# Altium PCB ReactionWheelPCB(1).PcbDoc
Units mm, origin at the board's own origin, x right, y up, seen from the top; angles counter-clockwise.
Board outline 90.17 x 95.88 mm, 4 copper layers (F.Cu, In1.Cu, In2.Cu, B.Cu); 37 components, 178 nets, 356 pads, 53 vias.
Unrouted connection lines stored in the file: 3.
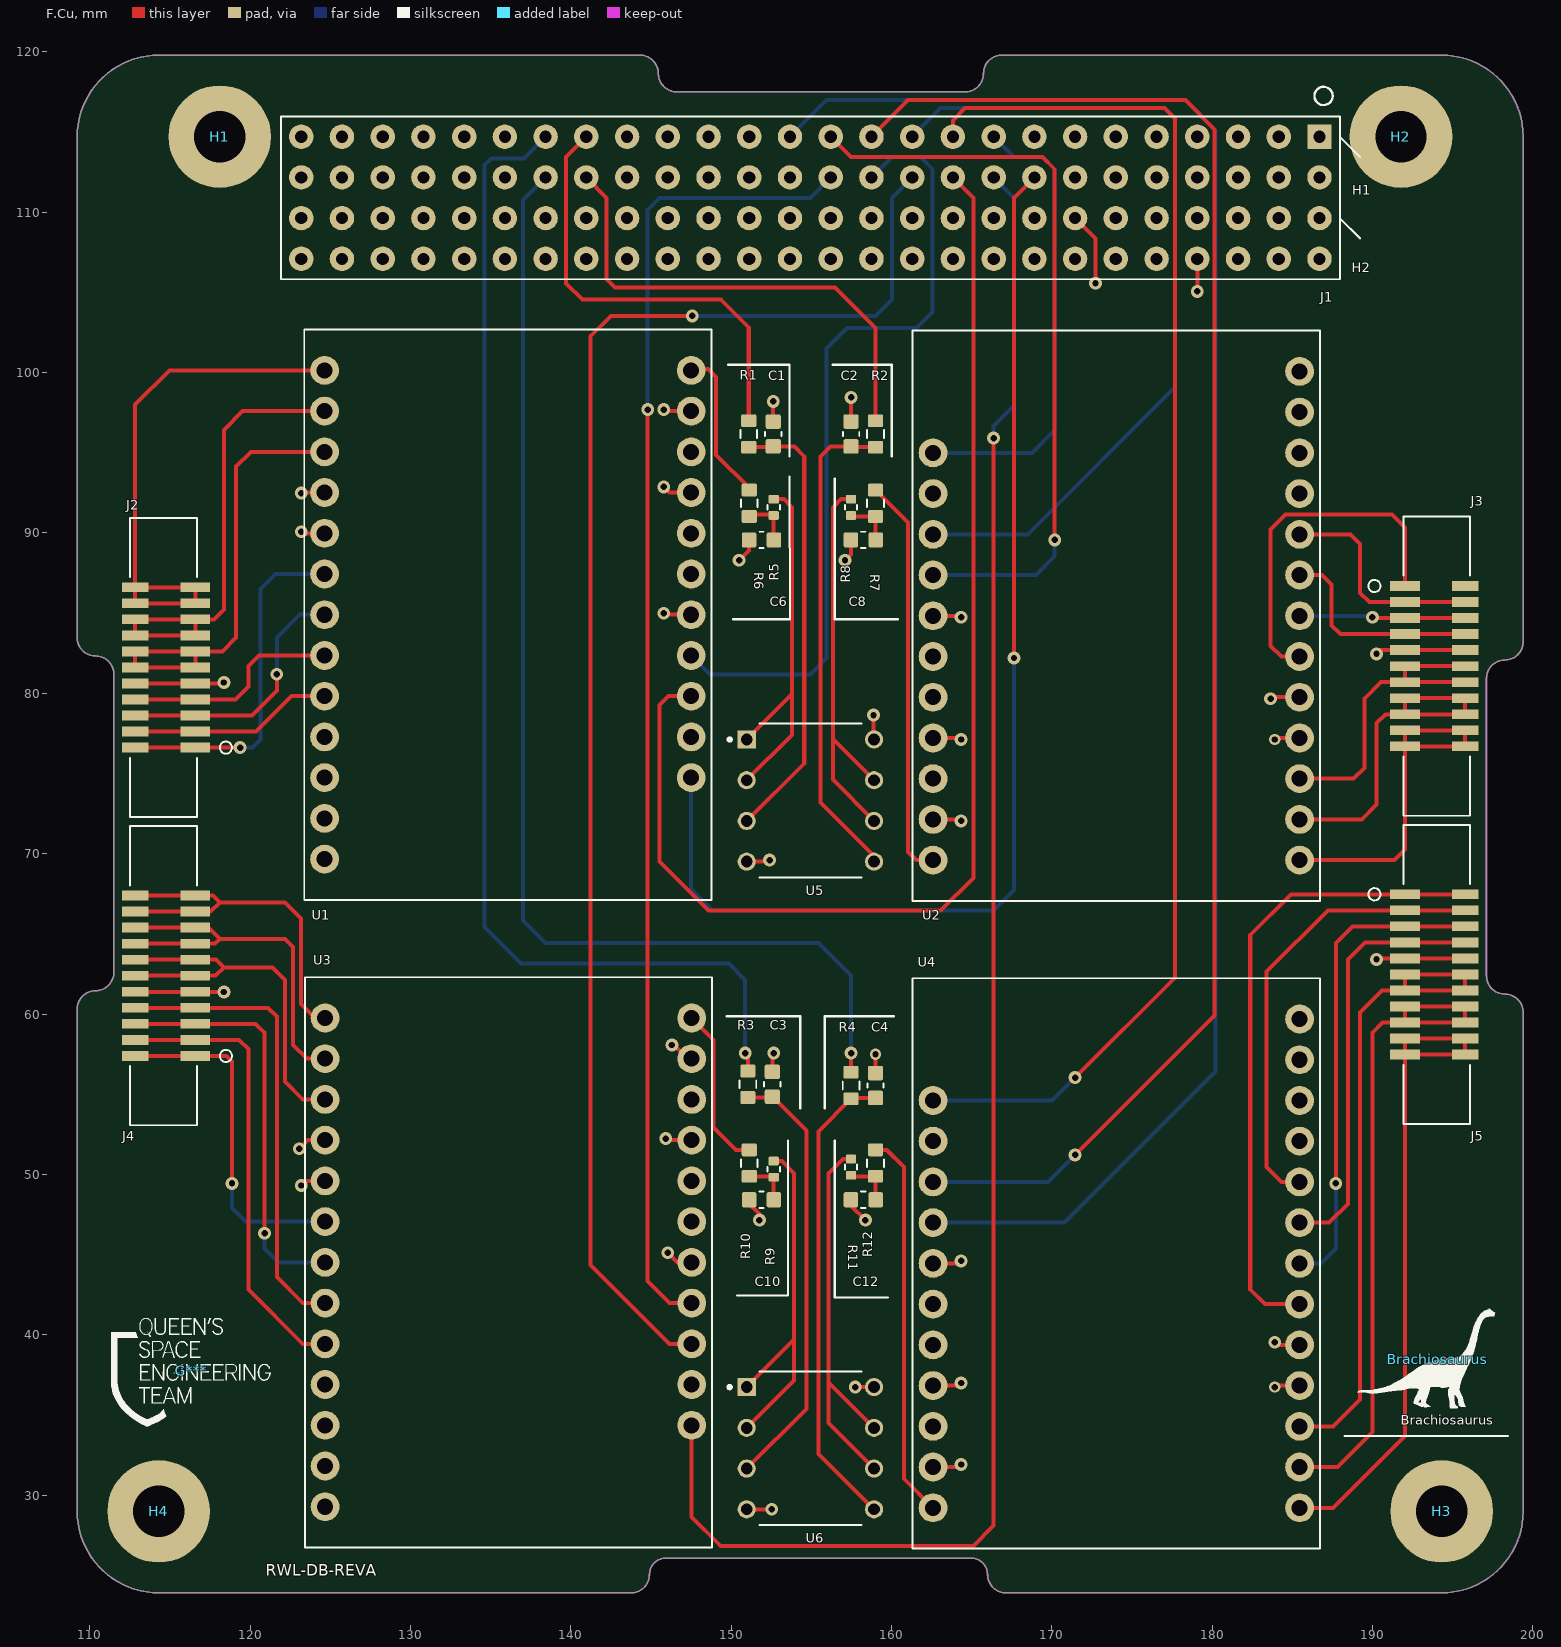
[diagram p0: F.Cu view]
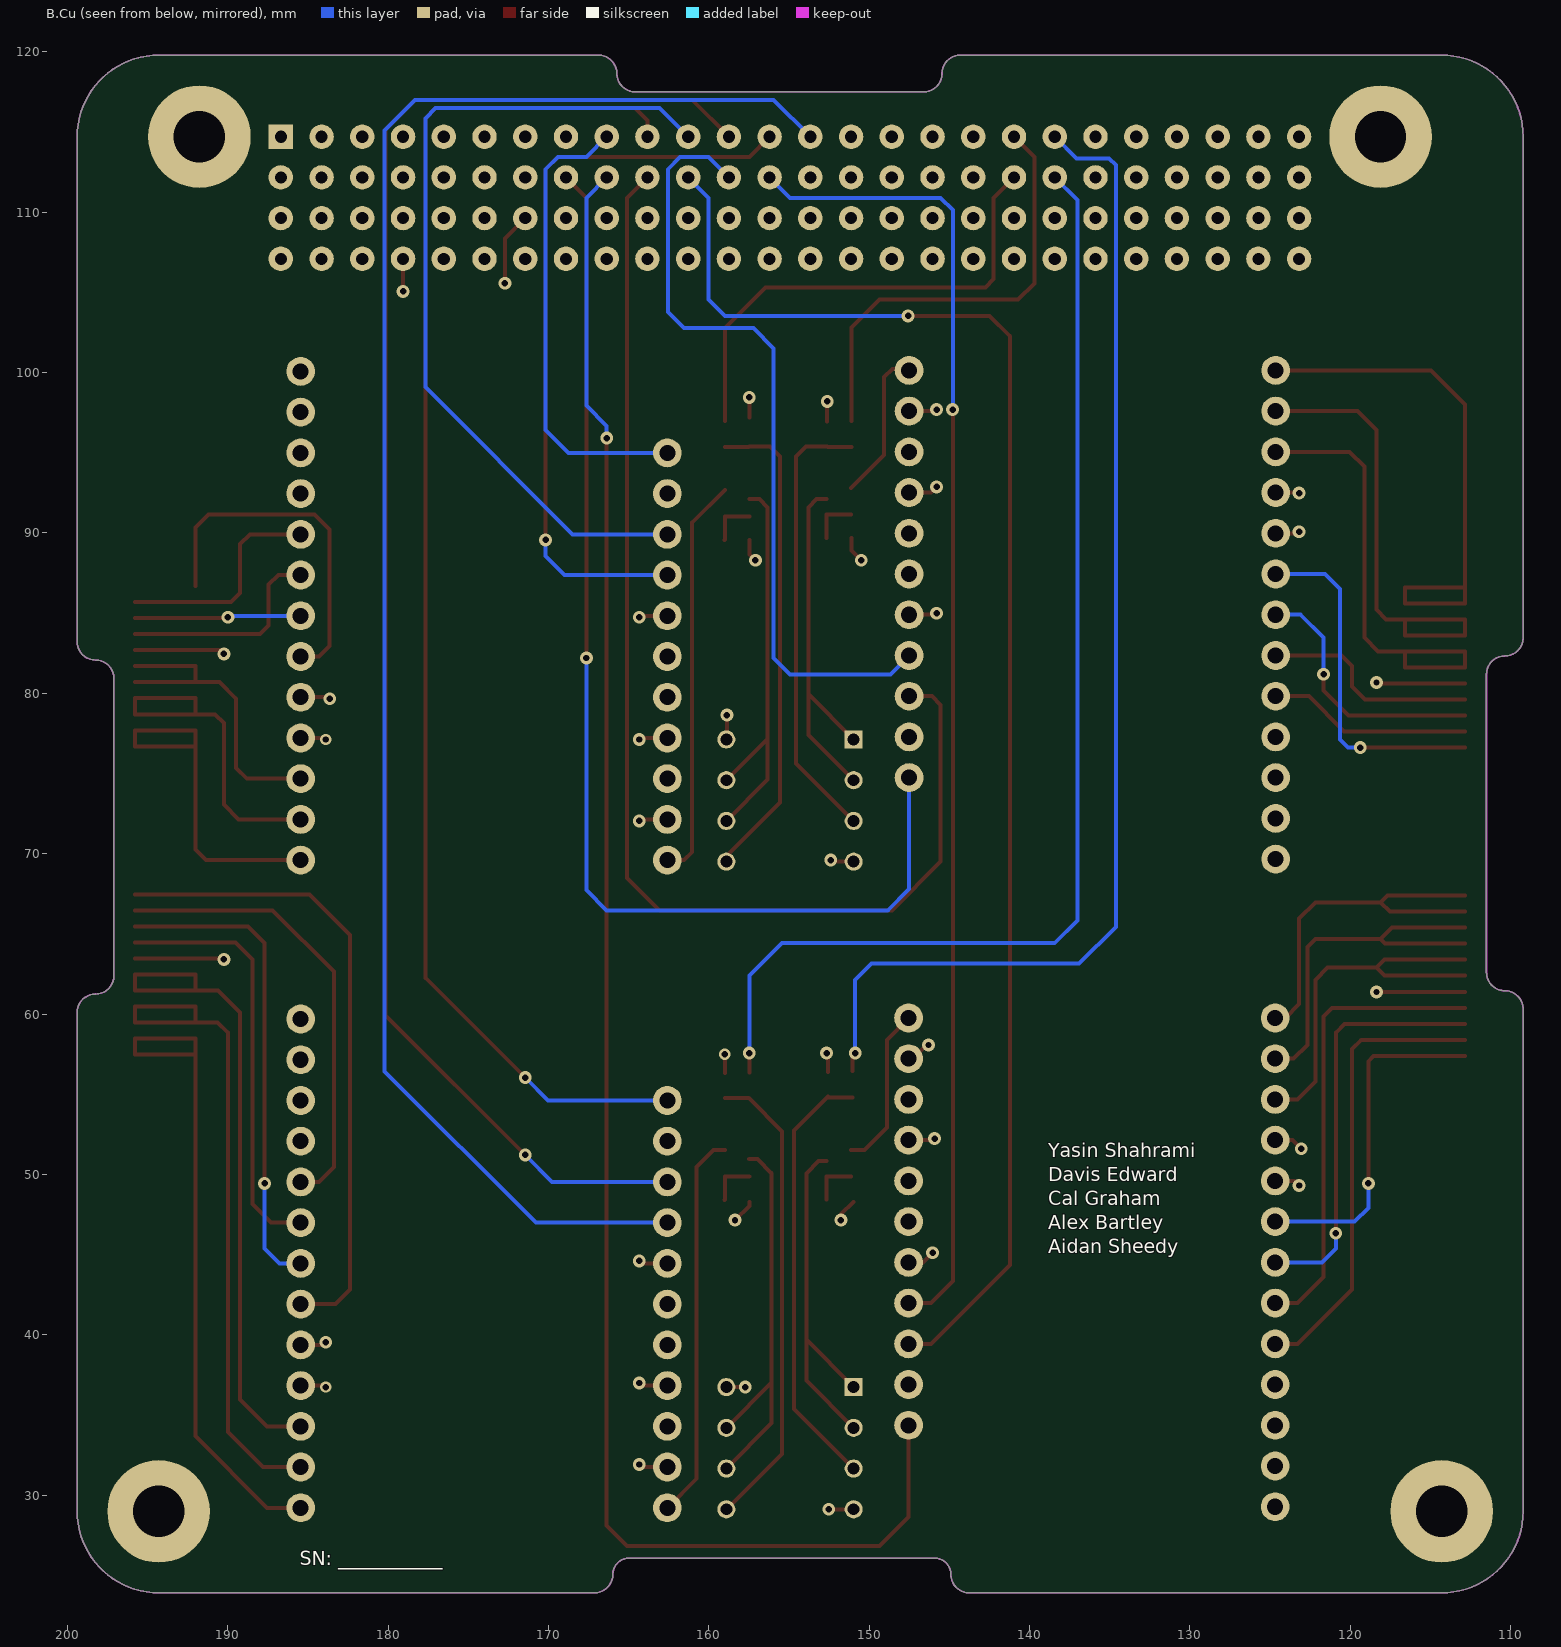
[diagram p1: B.Cu view, seen from below]
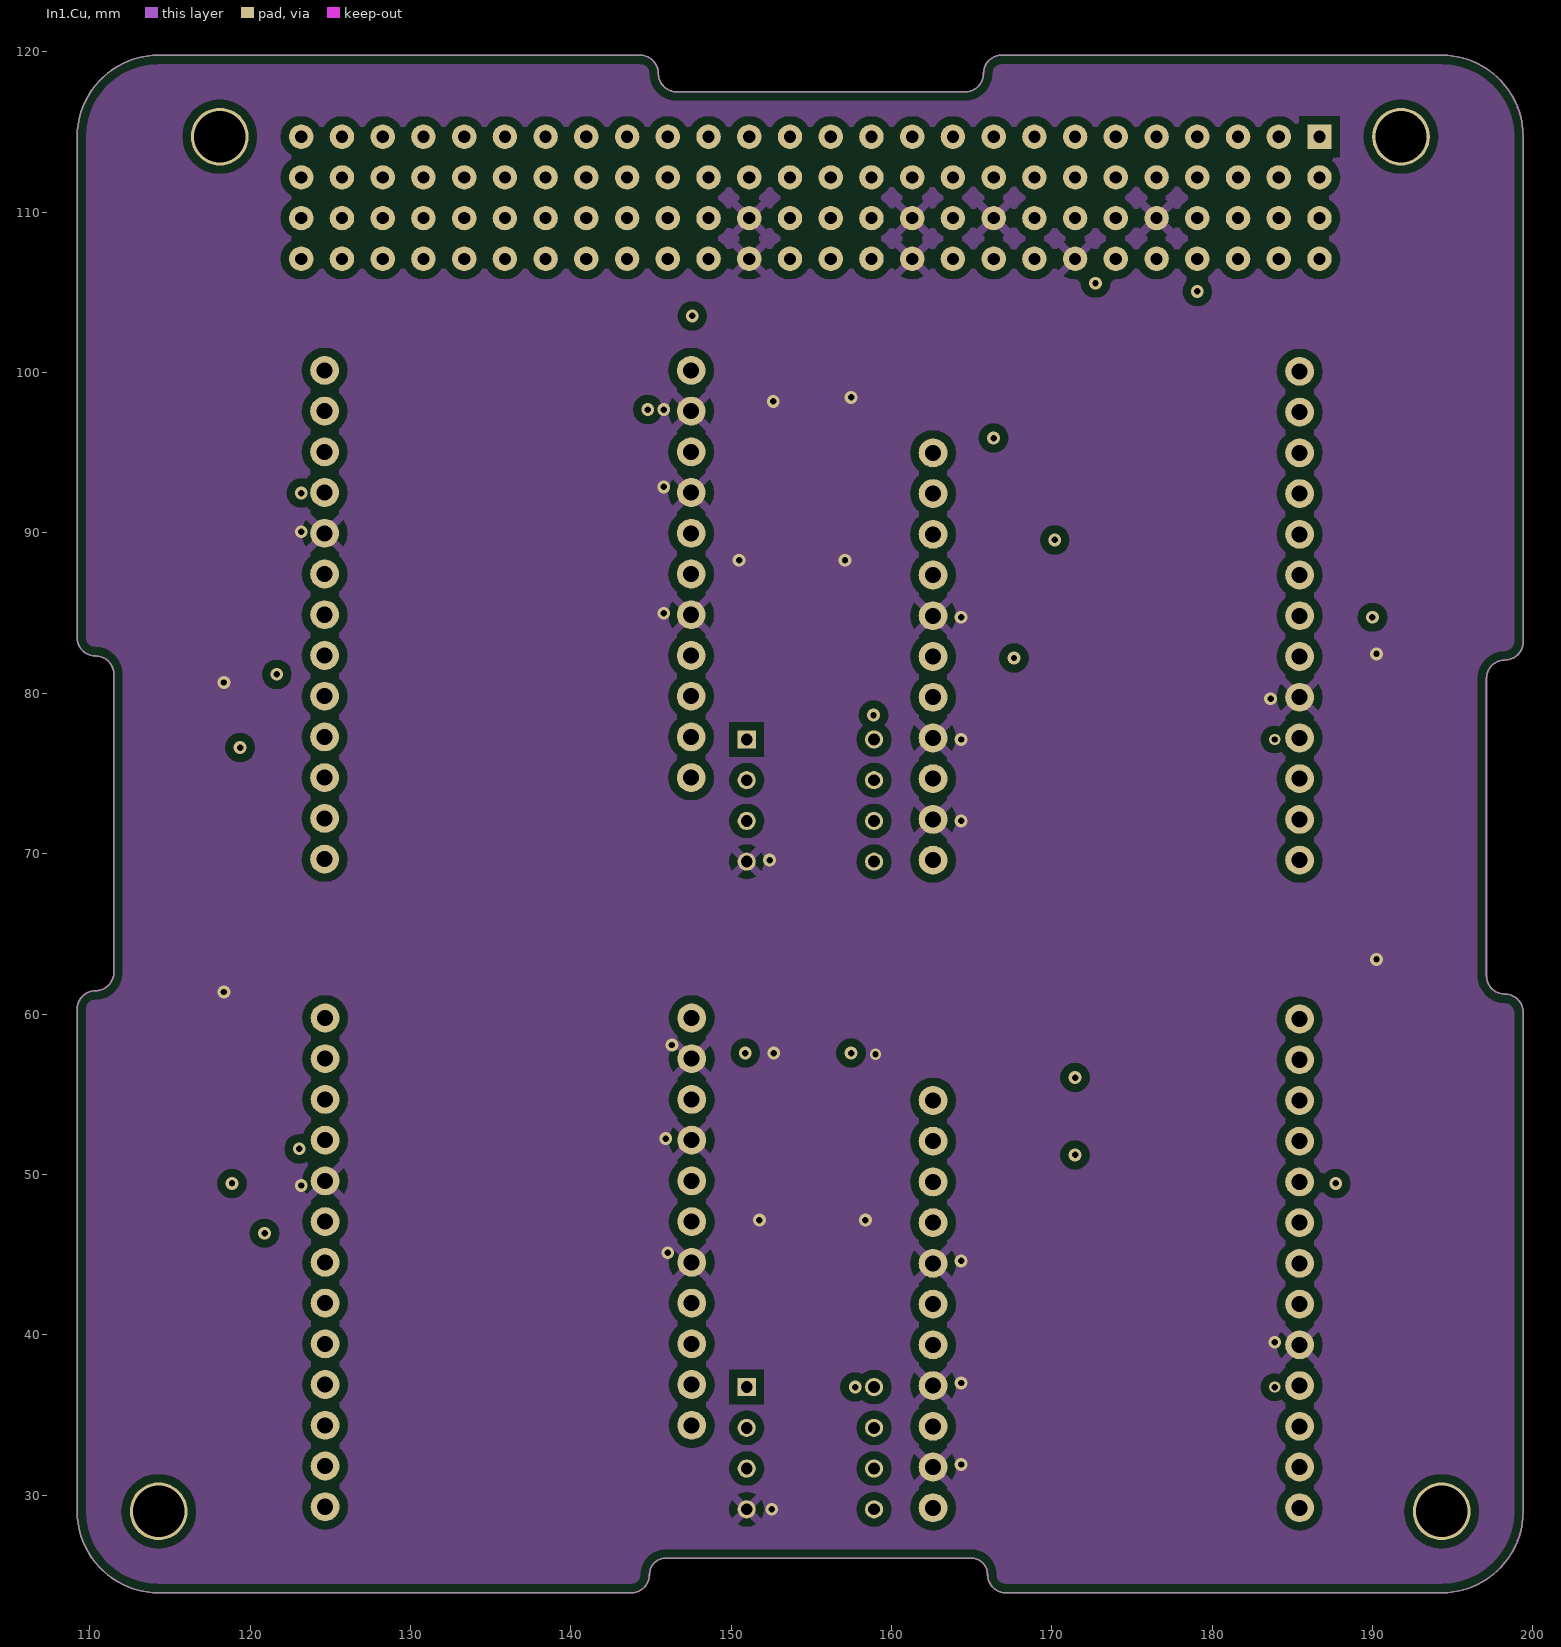
[diagram p2: In1.Cu]
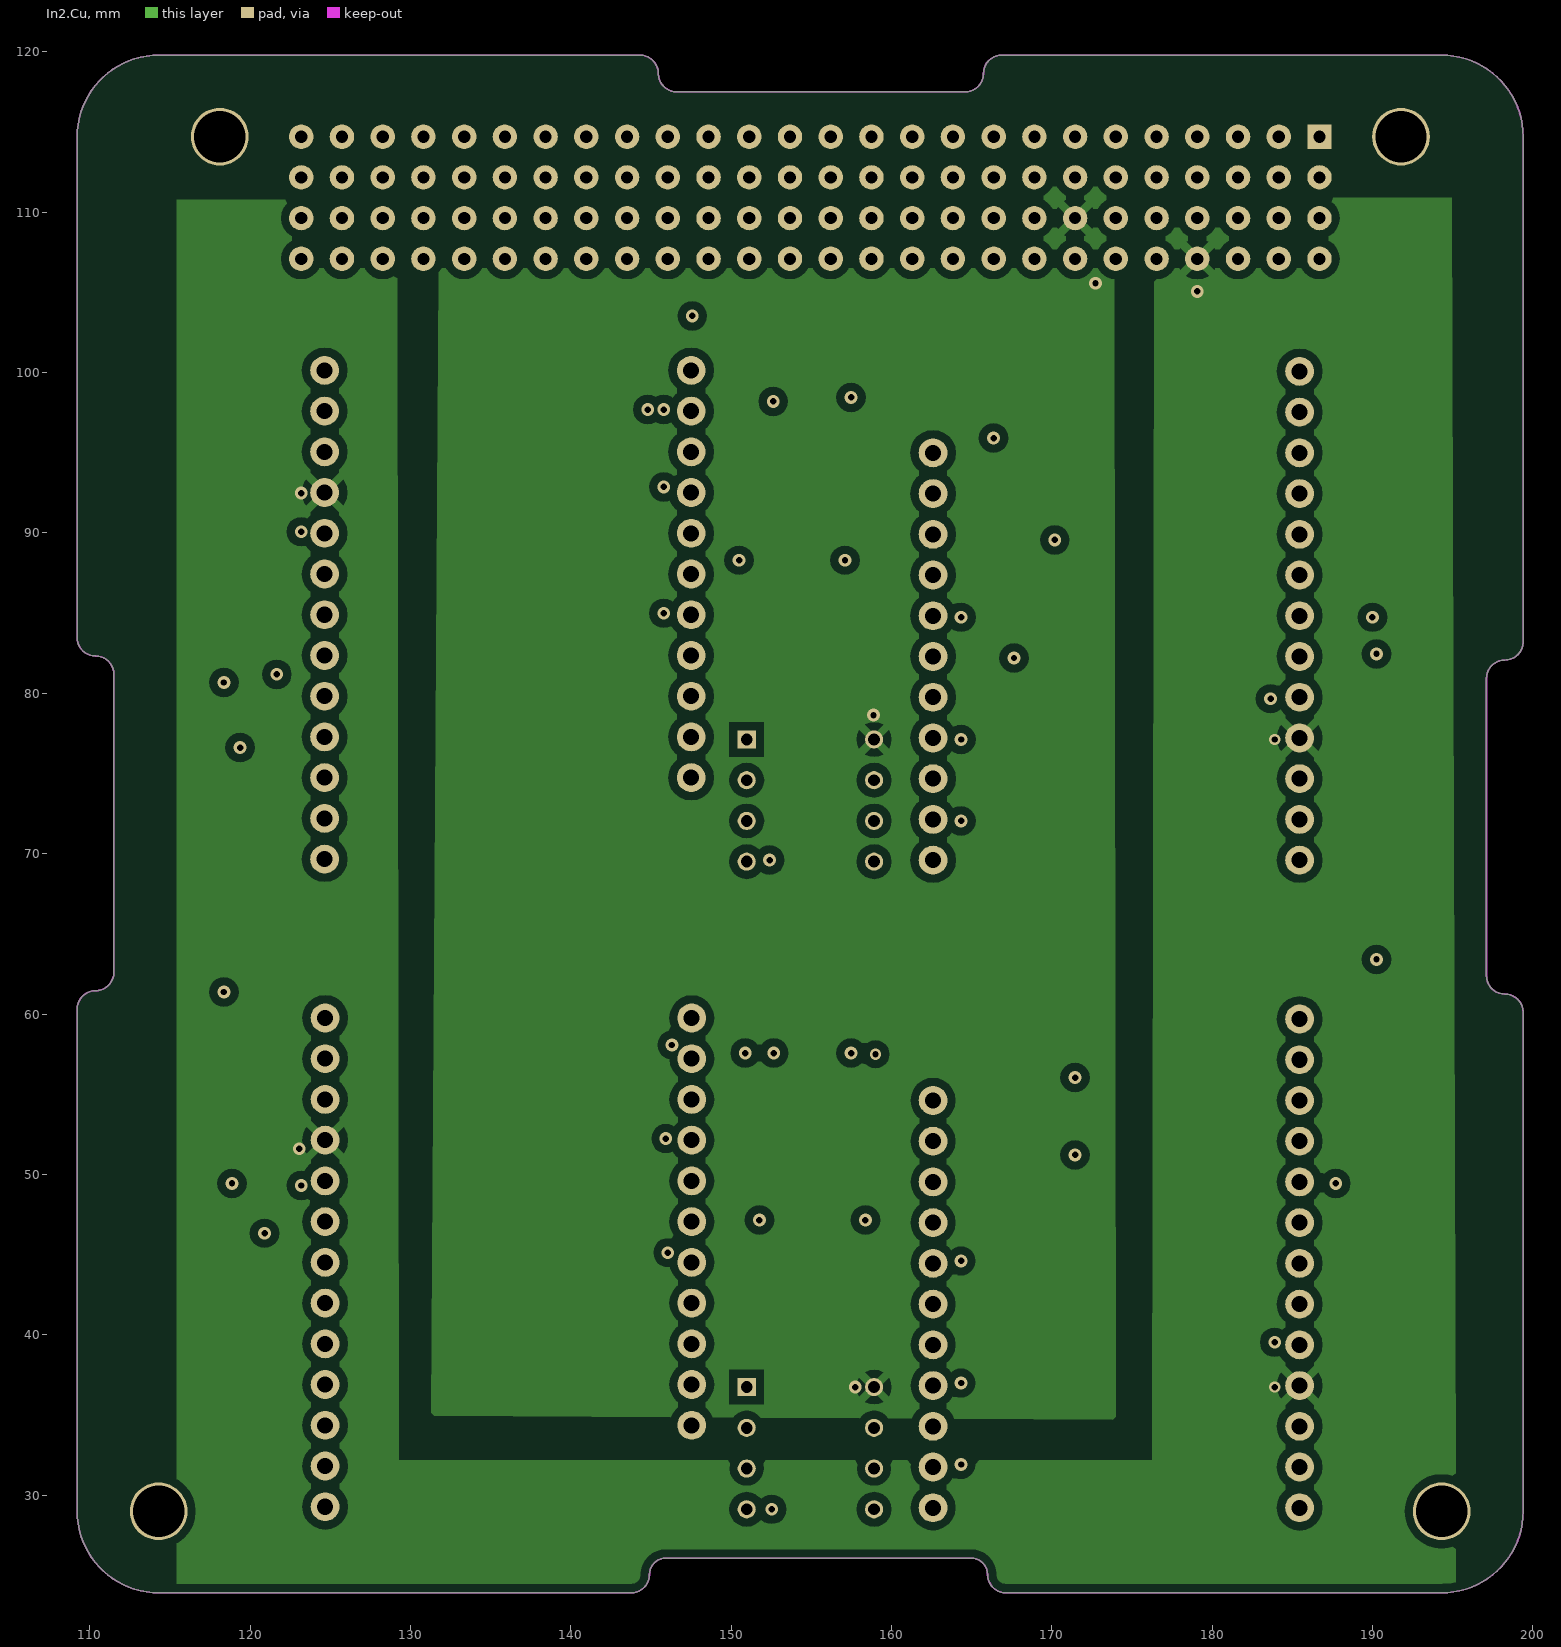
[diagram p3: In2.Cu]

## Layer stack, top to bottom
F.Mask: solder mask 0.0102, Solder Resist, Dk 3.5
F.Cu: signal copper 0.0356
Dielectric 1: dielectric 0.32, FR-4, Dk 4.8
In1.Cu: signal copper 0.0356
Dielectric2: dielectric 0.32, FR-4, Dk 4.8
In2.Cu: signal copper 0.0356
Dielectric3: dielectric 0.32, FR-4, Dk 4.8
B.Cu: signal copper 0.0356
B.Mask: solder mask 0.0102, Solder Resist, Dk 3.5

## Board outline
109.22,83.471 109.22,114.713 cw(c114.3,114.713) 114.3,119.793 144.318,119.793 cw(c144.318,118.65) 145.461,118.65 ccw(c146.604,118.65) 146.604,117.507 164.592,117.507 ccw(c164.592,118.65) 165.735,118.65 cw(c166.878,118.65) 194.31,119.793 cw(c194.31,114.713) 199.39,114.713 199.39,83.217 cw(c198.247,83.217) 198.247,82.074 ccw(c198.247,80.931) 197.104,80.931 197.104,62.389 ccw(c198.247,62.389) 198.247,61.246 cw(c198.247,60.103) 199.39,60.103 199.39,28.988 cw(c194.31,28.988) 194.31,23.908 167.132,23.908 cw(c167.132,25.051) 165.989,25.051 ccw(c164.973,25.051) 164.973,26.067 145.923,26.067 ccw(c145.923,25.051) 144.907,25.051 cw(c143.764,25.051) 143.764,23.908 114.3,23.908 cw(c114.3,28.988) 109.22,28.988 109.22,60.311 cw(c110.363,60.311) 110.363,61.454 ccw(c110.363,62.597) 111.506,62.597 111.506,81.185 ccw(c110.363,81.185) 110.363,82.328 cw(c110.363,83.471) 109.22,83.471

## Design rules (kind name [scope] priority, off if disabled: settings)
Clearance "Clearence 0.508_Polygon" [InNamedPolygon('In1.Cu-GND') OR InNamedPolygon('In2.Cu-+5V') OR InNamedPolygon('In2.Cu-+12V')] p1: gap=0.508 ignorepadtopadclearanceinfootprint=FALSE
MinimumSolderMaskSliver [All] p1: minsoldermaskwidth=0
PolygonConnect Polygon_In2.Cu-+12V_ConnectDirect [IsNamedPolygon('In2.Cu-+12V') vs IsVia] p1: connectstyle=Direct reliefconductorwidth=0.254 reliefentries=4 polygonreliefangle="90 Angle" airgapwidth=0.254
PolygonConnect Polygon_In2.Cu-+12V_ConnectRelief45 [IsNamedPolygon('In2.Cu-+12V') vs (IsThruPin or IsSMTPin) and (PadShape_AllLayers = 'Round')] p2: connectstyle=Relief reliefconductorwidth=0.508 reliefentries=4 polygonreliefangle="45 Angle" airgapwidth=0.508
PolygonConnect Polygon_In2.Cu-+12V_ConnectRelief90 [IsNamedPolygon('In2.Cu-+12V') vs (IsThruPin or IsSMTPin) and (PadShape_AllLayers <> 'Round')] p3: connectstyle=Relief reliefconductorwidth=0.508 reliefentries=4 polygonreliefangle="90 Angle" airgapwidth=0.508
PolygonConnect Polygon_In2.Cu-+5V_ConnectDirect [IsNamedPolygon('In2.Cu-+5V') vs IsVia] p4: connectstyle=Direct reliefconductorwidth=0.254 reliefentries=4 polygonreliefangle="90 Angle" airgapwidth=0.254
PolygonConnect Polygon_In2.Cu-+5V_ConnectRelief45 [IsNamedPolygon('In2.Cu-+5V') vs (IsThruPin or IsSMTPin) and (PadShape_AllLayers = 'Round')] p5: connectstyle=Relief reliefconductorwidth=0.508 reliefentries=4 polygonreliefangle="45 Angle" airgapwidth=0.508
PolygonConnect Polygon_In2.Cu-+5V_ConnectRelief90 [IsNamedPolygon('In2.Cu-+5V') vs (IsThruPin or IsSMTPin) and (PadShape_AllLayers <> 'Round')] p6: connectstyle=Relief reliefconductorwidth=0.508 reliefentries=4 polygonreliefangle="90 Angle" airgapwidth=0.508
PolygonConnect Polygon_In1.Cu-GND_ConnectDirect [IsNamedPolygon('In1.Cu-GND') vs IsVia] p7: connectstyle=Direct reliefconductorwidth=0.254 reliefentries=4 polygonreliefangle="90 Angle" airgapwidth=0.254
PolygonConnect Polygon_In1.Cu-GND_ConnectRelief45 [IsNamedPolygon('In1.Cu-GND') vs (IsThruPin or IsSMTPin) and (PadShape_AllLayers = 'Round')] p8: connectstyle=Relief reliefconductorwidth=0.508 reliefentries=4 polygonreliefangle="45 Angle" airgapwidth=0.508
PolygonConnect Polygon_In1.Cu-GND_ConnectRelief90 [IsNamedPolygon('In1.Cu-GND') vs (IsThruPin or IsSMTPin) and (PadShape_AllLayers <> 'Round')] p9: connectstyle=Relief reliefconductorwidth=0.508 reliefentries=4 polygonreliefangle="90 Angle" airgapwidth=0.508
RoutingVias [All] p1: holewidth=0.711 width=1.27 viastyle="Through Hole" minholewidth=0.711 minwidth=1.27 maxholewidth=0.711 maxwidth=1.27
SilkToSilkClearance [All] p1: silktosilkclearance=0
SilkToSolderMaskClearance [IsPad] p1: minsilkscreentomaskgap=0 clearancetoexposedcopper=TRUE
SolderMaskExpansion [All] p1: expansion=0.102 istentingtop=FALSE
Width [All] p1: maxlimit=10 minlimit=0.254 preferedwidth=0.254 minimp=50.000000 maximp=50.000000 favimp=50.000000
27 further rules are at their usual default settings.

## Components (designator, comment, footprint, x,y, rotation, side; value= is the part's Value field where it differs from the comment)
Brachiosaurus "LOGO" LOGO 194.056,38.486 r0 top
C1 "10nF" C_0603_1608Metric 152.622,96.171 r270 top
C2 "10nF" C_0603_1608Metric 157.48,96.171 r270 top
C3 "10nF" C_0603_1608Metric 152.567,55.618 r270 top
C4 "10nF" C_0603_1608Metric 159.004,55.544 r270 top
C6 "10nF" C_0603_1608Metric 151.892,89.567 r0 top
C8 "10nF" C_0603_1608Metric 158.242,89.567 r0 top
C10 "10nF" C_0603_1608Metric 151.892,48.419 r0 top
C12 "10nF" C_0603_1608Metric 158.242,48.419 r0 top
G*** "LOGO" LOGO 116.332,37.751 r0 top
H1 "MountingHole_Pad" MountingHole_3.2mm_M3_Pad_TopBottom 118.11,114.713 r0 top
H2 "MountingHole_Pad" MountingHole_3.2mm_M3_Pad_TopBottom 191.77,114.713 r0 top
H3 "MountingHole_Pad" MountingHole_3.2mm_M3_Pad_TopBottom 194.31,28.988 r0 top
H4 "MountingHole_Pad" MountingHole_3.2mm_M3_Pad_TopBottom 114.3,28.988 r0 top
J1 "PC104_Connector" pc104-connector 156.21,112.173 r270 top
J2 "Conn_02x11_Odd_Even" 1-1734248-1-reaction-wheel-connector 116.586,76.613 r270 top
J3 "Conn_02x11_Odd_Even" 1-1734248-1-reaction-wheel-connector 192.022,86.693 r90 top
J4 "Conn_02x11_Odd_Even" 1-1734248-1-reaction-wheel-connector 116.588,57.389 r270 top
J5 "Conn_02x11_Odd_Even" 1-1734248-1-reaction-wheel-connector 192.022,67.469 r90 top
R1 "10k" R_0603_1608Metric 151.098,96.171 r270 top
R2 "10k" R_0603_1608Metric 159.004,96.171 r270 top
R3 "10k" R_0603_1608Metric 151.043,55.618 r270 top
R4 "10k" R_0603_1608Metric 157.48,55.544 r270 top
R5 "5k" R_0402_1005Metric 152.654,91.599 r90 top
R6 "1M" R_0603_1608Metric 151.13,91.853 r270 top
R7 "5k" R_0402_1005Metric 157.48,91.599 r270 top
R8 "1M" R_0603_1608Metric 159.004,91.853 r90 top
R9 "5k" R_0402_1005Metric 152.654,50.324 r90 top
R10 "1M" R_0603_1608Metric 151.13,50.705 r270 top
R11 "5k" R_0402_1005Metric 157.48,50.451 r270 top
R12 "1M" R_0603_1608Metric 159.004,50.705 r90 top
U1 "Controller 1" Escon24.2 122.11,102.68 r90 top
U2 "Controller 2" Escon24.2 187.992,67.056 r270 top
U3 "Controller 3" Escon24.2 122.142,62.294 r90 top
U4 "Controller 4" Escon24.2 187.992,26.67 r270 top
U5 "LM358" DIP794W45P254L959H508Q8 154.94,73.311 r0 top
U6 "LM358" DIP794W45P254L959H508Q8 154.94,32.925 r0 top

## Footprints (in the part's own frame and the unit in brackets; to place one, negate y for a bottom-side part, rotate by r counter-clockwise, add the part's x,y. Pads: shape width x height; smd on the part's side, far side on the other; paste and mask are expansions set on the pad)
1-1734248-1-reaction-wheel-connector [mil]
  rect 24x73 smd mask+0: 1(0,0) 3(-39.37,0) 5(-78.74,0) 7(-118.11,0) 9(-157.48,0) 11(-196.85,0) 13(-236.22,0) 15(-275.59,0) 17(-314.96,0) 19(-354.33,0) 21(-393.7,0)
  rect 24x65 smd mask+0: 2(0,-147.64) 4(-39.37,-147.64) 6(-78.74,-147.64) 8(-118.11,-147.64) 10(-157.48,-147.64) 12(-196.85,-147.64) 14(-236.22,-147.64) 16(-275.59,-147.64) 18(-314.96,-147.64) 20(-354.33,-147.64) 22(-393.7,-147.64)
  silkscreen extent -564,-160 170,90
C_0603_1608Metric [mm]
  rrect25% 0.9x0.95 smd mask+0: 1(-0.775,0) 2(0.775,0)
  silkscreen extent -0.14,-0.51 0.14,0.51
DIP794W45P254L959H508Q8 [mm]
  rect 1.13x1.13 hole 0.74 paste-2539.97 mask+0: 1(-3.97,3.81)
  round 1.13 hole 0.74 paste-2539.97 mask+0: 2(-3.97,1.27) 3(-3.97,-1.27) 4(-3.97,-3.81) 5(3.97,-3.81) 6(3.97,-1.27) 7(3.97,1.27) 8(3.97,3.81)
  silkscreen extent -5.13,-4.79 3.17,4.79
Escon24.2 [mm]
  round 1.8 hole 1 paste-2539.97 mask+0: 1(-2.54,-2.54) 2(-5.08,-2.54) 3(-7.62,-2.54) 4(-10.16,-2.54) 5(-12.7,-2.54) 6(-15.24,-2.54) 7(-17.78,-2.54) 8(-20.32,-2.54) 9(-22.86,-2.54) 10(-25.4,-2.54) 11(-27.94,-2.54) 12(-30.48,-2.54) 13(-33.02,-2.54) 14(-27.94,-25.4) 15(-25.4,-25.4) 16(-22.86,-25.4) 17(-20.32,-25.4) 18(-17.78,-25.4) 19(-15.24,-25.4) 20(-12.7,-25.4) 21(-10.16,-25.4) 22(-7.62,-25.4) 23(-5.08,-25.4) 24(-2.54,-25.4)
  silkscreen extent -35.56,-26.67 0,-1.27
LOGO [mm]
  silkscreen extent -5.02,-3.08 3.58,3.14
MountingHole_3.2mm_M3_Pad_TopBottom [mm]
  round 3.6 hole 3.2 paste-2539.97 mask+0: 1(0,0)
  round 6.4 smd far side paste-6.4 mask+0: 1(0,0)
  round 6.4 smd paste-6.4 mask+0: 1(0,0)
pc104-connector [mil]
  rect 60x60 hole 30 paste-99999 mask+0: 1(-100,1200)
  round 60 hole 30 paste-99999 mask+0: 2(0,1200) 3(-100,1100) 4(0,1100) 5(-100,1000) 6(0,1000) 7(-100,900) 8(0,900) 9(-100,800) 10(0,800) 11(-100,700) 12(0,700) 13(-100,600) 14(0,600) 15(-100,500) 16(0,500) 17(-100,400) 18(0,400) 19(-100,300) 20(0,300) 21(-100,200) 22(0,200) 23(-100,100) 24(0,100) 25(-100,0) 26(0,0) 27(-100,-100) 28(0,-100) 29(-100,-200) 30(0,-200) 31(-100,-300) 32(0,-300) 33(-100,-400) 34(0,-400) 35(-100,-500) 36(0,-500) 37(-100,-600) 38(0,-600) 39(-100,-700) 40(0,-700) 41(-100,-800) 42(0,-800) 43(-100,-900) 44(0,-900) 45(-100,-1000) 46(0,-1000) 47(-100,-1100) 48(0,-1100) 49(-100,-1200) 50(0,-1200) 51(-100,-1300) 52(0,-1300) 53(100,1200) 54(200,1200) 55(100,1100) 56(200,1100) 57(100,1000) 58(200,1000) 59(100,900) 60(200,900) 61(100,800) 62(200,800) 63(100,700) 64(200,700) 65(100,600) 66(200,600) 67(100,500) 68(200,500) 69(100,400) 70(200,400) 71(100,300) 72(200,300) 73(100,200) 74(200,200) 75(100,100) 76(200,100) 77(100,0) 78(200,0) 79(100,-100) 80(200,-100) 81(100,-200) 82(200,-200) 83(100,-300) 84(200,-300) 85(100,-400) 86(200,-400) 87(100,-500) 88(200,-500) 89(100,-600) 90(200,-600) 91(100,-700) 92(200,-700) 93(100,-800) 94(200,-800) 95(100,-900) 96(200,-900) 97(100,-1000) 98(200,-1000) 99(100,-1100) 100(200,-1100) 101(100,-1200) 102(200,-1200) 103(100,-1300) 104(200,-1300)
  silkscreen extent -150,-1350 250,1300
R_0402_1005Metric [mm]
  rrect25% 0.54x0.64 smd mask+0: 1(-0.51,0) 2(0.51,0)
  silkscreen extent -0.15,-0.38 0.15,0.38
R_0603_1608Metric [mm]
  rrect25% 0.8x0.95 smd mask+0: 1(-0.825,0) 2(0.825,0)
  silkscreen extent -0.24,-0.52 0.24,0.52

## Part data
C1 C2 C3 C4 C6 C8 C10 C12: library part C_0603_1608Metric, "Capacitor SMD 0603 (1608 Metric), square (rectangular) end terminal, IPC_7351 nominal, (Body size source: IPC-SM-782 page 76, https://www.pcb-3d.com/wordpress/wp-content/uploads/ipc-sm-782a_amendment_1_and_2.pdf), generated with kicad-footprint-generator", Sheetfile=ReactionWheelPCB.kicad_sch
H1 H2 H3 H4: library part MountingHole_3.2mm_M3_Pad_TopBottom, "Mounting Hole 3.2mm, M3", Sheetfile=ReactionWheelPCB.kicad_sch
J1: library part pc104-connector, Sheetfile=ReactionWheelPCB.kicad_sch
J2 J3 J4 J5: library part 1-1734248-1-reaction-wheel-connector, Sheetfile=ReactionWheelPCB.kicad_sch
R1 R2 R3 R4 R6 R8 R10 R12: library part R_0603_1608Metric, "Resistor SMD 0603 (1608 Metric), square (rectangular) end terminal, IPC_7351 nominal, (Body size source: IPC-SM-782 page 72, https://www.pcb-3d.com/wordpress/wp-content/uploads/ipc-sm-782a_amendment_1_and_2.pdf), generated with kicad-footprint-generator", Sheetfile=ReactionWheelPCB.kicad_sch
R5 R7 R9 R11: library part R_0402_1005Metric, "Resistor SMD 0402 (1005 Metric), square (rectangular) end terminal, IPC_7351 nominal, (Body size source: IPC-SM-782 page 72, https://www.pcb-3d.com/wordpress/wp-content/uploads/ipc-sm-782a_amendment_1_and_2.pdf), generated with kicad-footprint-generator", Sheetfile=ReactionWheelPCB.kicad_sch
U1 U2 U3 U4: library part Escon24.2, Sheetfile=ReactionWheelPCB.kicad_sch
U5 U6: library part DIP794W45P254L959H508Q8, Sheetfile=ReactionWheelPCB.kicad_sch

## Via types
v1: diameter 0.8, hole 0.4, F.Cu to B.Cu, tented both sides, 50 vias
v2: diameter 0.7, hole 0.4, F.Cu to B.Cu, tented both sides, 3 vias

## Nets (pads, with @x,y where several pads share a name; then routed paths per layer and width w, separated by ;. In a path a pad name is that pad's centre, name@x,y a point inside that pad or via, vN(x,y) a via of type N, cw(c..) or ccw(c..) an arc to the next point about the centre after c; other vN are vias at no path point)
+5V: J1.65 U5.8 U6.8 | length 7.3
  F.Cu w0.25: v1(157.734,36.735) U6.8 ; v1(158.877,78.645) 158.877,77.154 U5.8 ; J1.65 172.72,108.363 v1(172.72,105.569)
+12V: J1.60 U1.4 U2.4 U3.4 U4.4 | length 8.5
  F.Cu w0.25: v1(123.063,51.594) 123.603,52.134 U3.4 ; v1(123.19,92.488) 123.222,92.52 U1.4 ; v1(179.07,105.061) J1.60 ; v2(183.896,36.735) 183.991,36.83 U4.4 ; v2(183.896,77.121) 183.991,77.216 U2.4
Direction(S1): J1.20 U1.16 | length 77.8
  F.Cu w0.25: U1.16 146.082,79.82 145.542,79.28 145.542,69.501 148.59,66.453 163.068,66.453 165.1,68.485 165.1,110.903 J1.20
Direction(S2): J1.21 U2.16 | length 53
  B.Cu w0.25: J1.21 163.068,116.491 177.038,116.491 177.673,115.856 177.673,99.092 168.497,89.916 U2.16
Direction(S3): J1.22 U3.16 | length 94.2
  F.Cu w0.25: U3.16 146.145,39.434 141.224,44.355 141.224,102.267 142.494,103.537 v1(147.574,103.537)
  B.Cu w0.25: v1(147.574,103.537) 159.004,103.537 160.02,104.553 160.02,110.903 J1.22
Direction(S4): J1.23 U4.16 | length 100.2
  F.Cu w0.25: J1.23 161.036,116.999 178.321,116.999 180.157,115.163 180.157,59.92 v1(171.45,51.213)
  B.Cu w0.25: U4.16 169.767,49.53 v1(171.45,51.213)
Enable(S1): J1.16 U1.14 | length 73.1
  F.Cu w0.25: v1(167.64,82.201) 167.64,110.903 J1.16
  B.Cu w0.25: U1.14 147.51,67.787 148.844,66.453 166.37,66.453 167.64,67.723 v1(167.64,82.201)
Enable(S2): J1.17 U2.14 | length 29.1
  B.Cu w0.25: U2.14 168.751,94.996 170.18,96.425 170.18,112.681 169.418,113.443 167.64,113.443 J1.17
Enable(S3): J1.18 U3.14 | length 110.9
  F.Cu w0.25: U3.14 147.542,28.639 149.352,26.829 165.1,26.829 166.37,28.099 v1(166.37,95.917)
  B.Cu w0.25: v1(166.37,95.917) 166.37,96.679 167.64,97.949 167.64,110.903 J1.18
Enable(S4): J1.19 U4.14 | length 87.3
  F.Cu w0.25: J1.19 163.83,115.729 164.592,116.491 177.038,116.491 177.673,115.856 177.673,62.262 v1(171.45,56.039)
  B.Cu w0.25: U4.14 170.021,54.61 v1(171.45,56.039)
GND: C1.1 C2.1 C3.1 C4.1 C6.1 C8.1 C10.1 C12.1 J1.61 J1.66 J1.69 J1.73 J1.74 J1.81 J1.82 J2.9 J2.10 J3.9 J3.10 J4.9 J4.10 J5.9 J5.10 U1.5 U1.18 U1.21 U1.23 U2.5 U2.18 U2.21 U2.23 U3.5 U3.18 U3.21 U3.23 U4.5 U4.18 U4.21 U4.23 U5.4 U6.4 | length 63.9
  F.Cu w0.25: J2.10 J2.9 118.3,80.613 v1(118.364,80.677) ; J4.10 J4.9 118.348,61.389 v1(118.364,61.373) ; v1(123.19,49.308) 123.476,49.594 U3.5 ; v1(123.19,90.075) 123.285,89.98 U1.5 ; v1(145.796,84.995) 145.891,84.9 U1.18 ; v1(145.796,92.869) 146.145,92.52 U1.21 ; v1(145.796,97.695) 145.891,97.6 U1.23 ; v1(145.923,52.229) 146.018,52.134 U3.21 ; v1(146.05,45.117) 146.653,44.514 U3.18 ; v1(146.304,58.071) 146.431,58.071 147.288,57.214 U3.23 ; v1(150.495,88.297) 151.117,88.919 C6.1@151.117,89.694 ; U5.4 152.305,69.501 v1(152.4,69.596) ; C10.1@150.99,48.292 151.765,47.517 v1(151.765,47.149) ; U6.4@151.003,29.115 v1(152.527,29.115) ; C3.1 152.567,57.476 v1(152.654,57.563) ; C1.1 v1(152.622,98.203) ; v1(157.099,88.297) 157.467,88.665 C8.1 ; C12.1@157.48,48.279 157.48,48.038 v1(158.369,47.149) ; C2.1@157.48,97.193 v1(157.48,98.45) ; C4.1 v2(159.004,57.489) ; U4.23 164.179,31.75 v1(164.338,31.909) ; U4.21 164.179,36.83 v1(164.338,36.989) ; U4.18 164.179,44.45 v1(164.338,44.609) ; U2.23 164.243,72.136 v1(164.338,72.041) ; U2.21 164.243,77.216 v1(164.338,77.121) ; U2.18 164.243,84.836 v1(164.338,84.741) ; v1(183.642,79.661) 183.737,79.756 U2.5 ; v1(183.896,39.529) 184.055,39.37 U4.5 ; v1(190.246,63.405) 190.31,63.469 J5.9 J5.10 ; v1(190.246,82.455) 190.484,82.693 J3.9 J3.10
Net-(C6-Pad2): C6.2 R5.1 R6.2 | length 3
  F.Cu w0.25: R6.2@151.13,91.155 152.654,91.155 152.654,89.707 C6.2@152.667,89.694
Net-(C8-Pad2): C8.2 R7.2 R8.1 | length 3
  F.Cu w0.25: R7.2@157.48,91.028 R8.1 159.004,89.58 C8.2
Net-(C10-Pad2): C10.2 R9.1 R10.2 | length 3
  F.Cu w0.254: R10.2 152.654,49.88 C10.2@152.654,48.432
Net-(C12-Pad2): C12.2 R11.2 R12.1 | length 3
  F.Cu w0.254: R11.2@157.48,49.88 R12.1 159.004,48.432 C12.2
Net-(R5-Pad2): R5.2 U5.1 U5.2 | length 23.5
  F.Cu w0.25: U5.2 153.797,77.408 153.797,79.948 ; U5.1 153.797,79.948 ; R5.2 153.287,92.109 153.797,91.599 153.797,79.948
Net-(R7-Pad1): R7.1 U5.6 U5.7 | length 25.6
  F.Cu w0.25: R7.1 156.847,92.109 156.337,91.599 156.337,77.154 ; U5.6 156.337,74.614 156.337,77.154 ; U5.7 156.337,77.154
Net-(R9-Pad2): R9.2 U6.1 U6.2 | length 22.9
  F.Cu w0.25: U6.2 153.924,37.149 153.924,39.689 ; U6.1 153.924,39.689 ; R9.2 153.16,50.834 153.924,50.07 153.924,39.689
Net-(R11-Pad1): R11.1 U6.6 U6.7 | length 26.2
  F.Cu w0.25: 156.083,49.562 156.083,37.878 ; U6.6 156.083,34.482 156.083,37.878 ; U6.7 156.083,37.022 156.083,37.878
  F.Cu w0.254: 156.083,49.562 156.083,50.07 156.974,50.961 R11.1
Net-(U1-Pad1): J2.19 J2.20 J2.21 J2.22 U1.1 | length 33.6
  F.Cu w0.25: U1.1 114.967,100.14 112.836,98.009 J2.22 ; J2.22 J2.20 J2.19 J2.21 J2.22
Net-(U1-Pad2): J2.15 J2.16 J2.17 J2.18 U1.2 | length 29.5
  F.Cu w0.25: U1.2 119.539,97.6 118.364,96.425 118.364,85.214 117.763,84.613 J2.17 ; J2.17 J2.15 J2.16 J2.18 J2.17
Net-(U1-Pad3): J2.11 J2.12 J2.13 J2.14 U1.3 | length 29
  F.Cu w0.25: U1.3 120.047,95.06 119.126,94.139 119.126,83.471 118.268,82.613 J2.13 ; J2.13 J2.11 J2.12 J2.14 J2.13
Net-(U1-Pad6): J2.1 J2.2 U1.6 | length 21.8
  F.Cu w0.25: J2.2 J2.1 v1(119.38,76.613)
  B.Cu w0.25: v1(119.38,76.613) 120.142,76.613 120.65,77.121 120.65,86.519 121.571,87.44 U1.6
Net-(U1-Pad7): J2.5 J2.6 U1.7 | length 16.4
  F.Cu w0.25: J2.6 J2.5 120.11,78.613 121.666,80.169 v1(121.666,81.185)
  B.Cu w0.25: v1(121.666,81.185) 121.666,83.217 121.666,83.471 123.095,84.9 U1.7
Net-(U1-Pad8): J2.7 J2.8 U1.8 | length 13.7
  F.Cu w0.25: J2.8 J2.7 119.078,79.613 119.888,80.423 119.888,81.693 120.555,82.36 U1.8
Net-(U1-Pad9): J2.3 J2.4 U1.9 | length 12.7
  F.Cu w0.25: J2.4 J2.3 120.38,77.613 122.587,79.82 U1.9
Net-(U2-Pad1): J3.19 J3.20 J3.21 J3.22 U2.1 | length 22.8
  F.Cu w0.25: U2.1 191.357,69.596 192.022,70.261 J3.21 ; J3.21 J3.19 J3.20 J3.22 J3.21
Net-(U2-Pad2): J3.15 J3.16 J3.17 J3.18 U2.2 | length 21.8
  F.Cu w0.25: U2.2 189.325,72.136 190.246,73.057 190.246,78.137 190.802,78.693 J3.17 ; J3.17 J3.15 J3.16 J3.18 J3.17
Net-(U2-Pad3): J3.11 J3.12 J3.13 J3.14 U2.3 | length 20.1
  F.Cu w0.25: U2.3 188.817,74.676 189.484,75.343 189.484,79.661 190.516,80.693 J3.13 ; J3.14 J3.13 ; J3.12 J3.11 J3.13
Net-(U2-Pad6): J3.1 J3.2 U2.6 | length 22.1
  F.Cu w0.25: U2.6 184.309,82.296 183.642,82.963 183.642,90.202 184.581,91.141 191.212,91.141 192.024,90.329 192.024,87.25 192.022,87.248 J3.1
Net-(U2-Pad7): J3.5 J3.6 U2.7 | length 10.4
  F.Cu w0.25: v1(189.992,84.741) 190.04,84.693 J3.5 J3.6
  B.Cu w0.25: U2.7 189.897,84.836 v1(189.992,84.741)
Net-(U2-Pad8): J3.7 J3.8 U2.8 | length 13.3
  F.Cu w0.25: U2.8 186.849,87.376 187.452,86.773 187.452,84.233 187.992,83.693 J3.7 J3.8
Net-(U2-Pad9): J3.3 J3.4 U2.9 | length 13.9
  F.Cu w0.25: U2.9 188.627,89.916 189.23,89.313 189.23,86.265 189.802,85.693 J3.3 J3.4
Net-(U3-Pad1): J4.19 J4.20 J4.21 J4.22 U3.1 | length 23.6
  F.Cu w0.25: J4.20 J4.19 117.538,66.389 118.11,66.961 ; J4.22 J4.21 117.682,67.389 118.11,66.961 ; U3.1 124.047,59.754 123.19,60.611 123.19,65.945 122.174,66.961 118.11,66.961
Net-(U3-Pad2): J4.15 J4.16 J4.17 J4.18 U3.2 | length 24.2
  F.Cu w0.25: J4.16 J4.15 117.824,64.389 118.11,64.675 ; J4.18 J4.17 117.396,65.389 118.11,64.675 ; U3.2 123.539,57.214 122.682,58.071 122.682,64.167 122.174,64.675 118.11,64.675
Net-(U3-Pad3): J4.11 J4.12 J4.13 J4.14 U3.3 | length 24.9
  F.Cu w0.25: J4.12 J4.11 117.856,62.389 118.364,62.897 ; J4.14 J4.13 117.872,63.389 118.364,62.897 ; U3.3 123.285,54.674 122.174,55.785 122.174,62.135 121.412,62.897 118.364,62.897
Net-(U3-Pad6): J4.1 J4.2 U3.6 | length 21.5
  F.Cu w0.25: J4.2 J4.1 118.538,57.389 118.872,57.055 v1(118.872,49.435)
  B.Cu w0.25: v1(118.872,49.435) 118.872,47.911 119.729,47.054 U3.6
Net-(U3-Pad7): J4.5 J4.6 U3.7 | length 27.5
  F.Cu w0.25: J4.6 J4.5 120.348,59.389 120.904,58.833 v1(120.904,46.329)
  B.Cu w0.25: v1(120.904,46.329) 120.904,45.371 121.761,44.514 U3.7 123.095,44.514
Net-(U3-Pad8): J4.7 J4.8 U3.8 | length 29
  F.Cu w0.25: J4.8 J4.7 121.126,60.389 121.666,59.849 121.666,43.593 123.285,41.974 U3.8
Net-(U3-Pad9): J4.3 J4.4 U3.9 | length 28.5
  F.Cu w0.25: J4.4 J4.3 119.316,58.389 119.888,57.817 119.888,42.831 123.285,39.434 U3.9
Net-(U4-Pad1): J5.19 J5.20 J5.21 J5.22 U4.1 | length 43.5
  F.Cu w0.25: U4.1 187.547,29.21 192.022,33.685 192.022,35.717 ; 192.022,33.943 192.022,35.717 ; 192.022,35.717 J5.21 ; J5.21 J5.19 J5.20 J5.22 J5.21
Net-(U4-Pad2): J5.15 J5.16 J5.17 J5.18 U4.2 | length 42.1
  F.Cu w0.25: U4.2 187.801,31.75 189.992,33.941 189.992,58.833 190.628,59.469 J5.17 ; J5.17 J5.18 J5.16 J5.15 J5.17
Net-(U4-Pad3): J5.11 J5.12 J5.13 J5.14 U4.3 | length 41.5
  F.Cu w0.25: U4.3 187.547,34.29 189.23,35.973 189.23,60.103 190.596,61.469 J5.13 ; J5.13 J5.11 J5.12 J5.14 J5.13
Net-(U4-Pad6): J5.1 J5.2 U4.6 | length 40
  F.Cu w0.25: U4.6 183.293,41.91 182.372,42.831 182.372,64.929 184.912,67.469 J5.1 J5.2
Net-(U4-Pad7): J5.5 J5.6 U4.7 | length 30.2
  F.Cu w0.25: v1(187.706,49.435) 187.706,64.421 188.754,65.469 J5.5 J5.6
  B.Cu w0.25: U4.7 186.785,44.45 187.706,45.371 v1(187.706,49.435)
Net-(U4-Pad8): J5.7 J5.8 U4.8 | length 26.5
  F.Cu w0.25: U4.8 187.293,46.99 188.468,48.165 188.468,63.405 189.532,64.469 J5.7 J5.8
Net-(U4-Pad9): J5.3 J5.4 U4.9 | length 28.6
  F.Cu w0.25: U4.9 184.309,49.53 183.388,50.451 183.388,62.643 187.214,66.469 J5.3 J5.4
PWM-SetValue(S1): J1.24 U1.17 | length 49.8
  B.Cu w0.25: U1.17 148.685,81.185 154.94,81.185 155.956,82.201 155.956,101.505 157.226,102.775 161.544,102.775 162.56,103.791 162.56,112.681 161.798,113.443 160.02,113.443 J1.24
PWM-SetValue(S2): J1.25 U2.17 | length 47
  F.Cu w0.25: J1.25 157.48,113.443 169.418,113.443 170.18,112.681 v1(170.18,89.567)
  B.Cu w0.25: U2.17 169.005,87.376 170.18,88.551 v1(170.18,89.567)
PWM-SetValue(S3): J1.26 U3.17 | length 82.4
  F.Cu w0.25: v1(144.796,97.695) 144.78,97.679 144.78,43.339 146.145,41.974 U3.17
  B.Cu w0.25: v1(144.796,97.695) 144.78,97.711 144.78,110.141 145.542,110.903 154.94,110.903 J1.26
PWM-SetValue(S4): J1.27 U4.17 | length 108.5
  B.Cu w0.25: J1.27 155.956,116.999 178.321,116.999 180.213,115.107 180.213,56.42 170.783,46.99 U4.17
RampControl(S1)_IN: J1.37 R1.1 | length 28
  F.Cu w0.25: J1.37 139.7,113.443 139.7,105.569 140.716,104.553 149.352,104.553 151.098,102.807 R1.1
RampControl(S1)_Out: R6.1 U1.24 | length 9.6
  F.Cu w0.25: U1.24 147.605,100.235 148.558,100.235 149.066,99.727 149.066,94.869 R6.1@151.13,92.805
RampControl(S1)_RC: C1.2 R1.2 U5.3 | length 28
  F.Cu w0.25: U5.3 154.559,75.63 154.559,94.774 153.937,95.396 C1.2 152.572,95.346 R1.2
RampControl(S2)_IN: J1.38 R2.1 | length 31.9
  F.Cu w0.25: J1.38 142.24,110.903 142.24,105.823 142.748,105.315 156.464,105.315 159.004,102.775 R2.1 159.004,98.203
RampControl(S2)_Out: R8.2 U2.24 | length 25.2
  F.Cu w0.25: R8.2 161.036,90.646 161.036,70.104 161.544,69.596 U2.24
RampControl(S2)_RC: C2.2 R2.2 U5.5 | length 30.4
  F.Cu w0.25: U5.5 158.91,69.849 155.575,73.184 155.575,94.774 156.197,95.396 C2.2 157.53,95.346 R2.2
RampControl(S3)_IN: J1.39 R3.1 | length 75.4
  F.Cu w0.25: v1(150.876,57.563) 151.043,57.396 R3.1
  B.Cu w0.25: J1.39 137.079,113.362 135.047,113.362 134.62,112.935 134.62,65.437 136.906,63.151 149.86,63.151 150.876,62.135 v1(150.876,57.563)
RampControl(S3)_Out: R10.1 U3.24 | length 10.2
  F.Cu w0.25: U3.24 148.903,58.393 148.903,53.503
  F.Cu w0.254: 148.903,53.503 148.903,52.932 150.305,51.53 R10.1
RampControl(S3)_RC: C3.2 R3.2 U6.3 | length 27.1
  F.Cu w0.25: U6.3 154.686,35.371 154.686,52.724 C3.2 152.517,54.793 R3.2
RampControl(S4)_IN: J1.40 R4.1 | length 74.8
  F.Cu w0.25: R4.1 v1(157.48,57.563)
  B.Cu w0.25: J1.40 137.011,110.754 137.011,65.84 138.43,64.421 155.448,64.421 157.48,62.389 v1(157.48,57.563)
RampControl(S4)_Out: R12.2 U4.24 | length 24.2
  F.Cu w0.25: 160.782,48.101 160.782,47.403 160.782,31.02 U4.24
  F.Cu w0.254: R12.2 159.703,51.53 160.782,50.451 160.782,48.101
RampControl(S4)_RC: C4.2 R4.2 U6.5 | length 29.4
  F.Cu w0.25: U6.5 155.448,32.577 155.448,52.687 R4.2 157.53,54.769 C4.2
unconnected-(H1-Pad1): H1.1
unconnected-(H2-Pad1): H2.1
unconnected-(H3-Pad1): H3.1
unconnected-(H4-Pad1): H4.1
unconnected-(J1-Pad1): J1.1
unconnected-(J1-Pad2): J1.2
unconnected-(J1-Pad3): J1.3
unconnected-(J1-Pad4): J1.4
unconnected-(J1-Pad5): J1.5
unconnected-(J1-Pad6): J1.6
unconnected-(J1-Pad7): J1.7
unconnected-(J1-Pad8): J1.8
unconnected-(J1-Pad9): J1.9
unconnected-(J1-Pad10): J1.10
unconnected-(J1-Pad11): J1.11
unconnected-(J1-Pad12): J1.12
unconnected-(J1-Pad13): J1.13
unconnected-(J1-Pad14): J1.14
unconnected-(J1-Pad15): J1.15
unconnected-(J1-Pad28): J1.28
unconnected-(J1-Pad29): J1.29
unconnected-(J1-Pad30): J1.30
unconnected-(J1-Pad31): J1.31
unconnected-(J1-Pad32): J1.32
unconnected-(J1-Pad33): J1.33
unconnected-(J1-Pad34): J1.34
unconnected-(J1-Pad35): J1.35
unconnected-(J1-Pad36): J1.36
unconnected-(J1-Pad41): J1.41
unconnected-(J1-Pad42): J1.42
unconnected-(J1-Pad43): J1.43
unconnected-(J1-Pad44): J1.44
unconnected-(J1-Pad45): J1.45
unconnected-(J1-Pad46): J1.46
unconnected-(J1-Pad47): J1.47
unconnected-(J1-Pad48): J1.48
unconnected-(J1-Pad49): J1.49
unconnected-(J1-Pad50): J1.50
unconnected-(J1-Pad51): J1.51
unconnected-(J1-Pad52): J1.52
unconnected-(J1-Pad53): J1.53
unconnected-(J1-Pad54): J1.54
unconnected-(J1-Pad55): J1.55
unconnected-(J1-Pad56): J1.56
unconnected-(J1-Pad57): J1.57
unconnected-(J1-Pad58): J1.58
unconnected-(J1-Pad59): J1.59
unconnected-(J1-Pad62): J1.62
unconnected-(J1-Pad63): J1.63
unconnected-(J1-Pad64): J1.64
unconnected-(J1-Pad67): J1.67
unconnected-(J1-Pad68): J1.68
unconnected-(J1-Pad70): J1.70
unconnected-(J1-Pad71): J1.71
unconnected-(J1-Pad72): J1.72
unconnected-(J1-Pad75): J1.75
unconnected-(J1-Pad76): J1.76
unconnected-(J1-Pad77): J1.77
unconnected-(J1-Pad78): J1.78
unconnected-(J1-Pad79): J1.79
unconnected-(J1-Pad80): J1.80
unconnected-(J1-Pad83): J1.83
unconnected-(J1-Pad84): J1.84
unconnected-(J1-Pad85): J1.85
unconnected-(J1-Pad86): J1.86
unconnected-(J1-Pad87): J1.87
unconnected-(J1-Pad88): J1.88
unconnected-(J1-Pad89): J1.89
unconnected-(J1-Pad90): J1.90
unconnected-(J1-Pad91): J1.91
unconnected-(J1-Pad92): J1.92
unconnected-(J1-Pad93): J1.93
unconnected-(J1-Pad94): J1.94
unconnected-(J1-Pad95): J1.95
unconnected-(J1-Pad96): J1.96
unconnected-(J1-Pad97): J1.97
unconnected-(J1-Pad98): J1.98
unconnected-(J1-Pad99): J1.99
unconnected-(J1-Pad100): J1.100
unconnected-(J1-Pad101): J1.101
unconnected-(J1-Pad102): J1.102
unconnected-(J1-Pad103): J1.103
unconnected-(J1-Pad104): J1.104
unconnected-(U1-Pad10): U1.10
unconnected-(U1-Pad11): U1.11
unconnected-(U1-Pad12): U1.12
unconnected-(U1-Pad13): U1.13
unconnected-(U1-Pad15): U1.15
unconnected-(U1-Pad19): U1.19
unconnected-(U1-Pad20): U1.20
unconnected-(U1-Pad22): U1.22
unconnected-(U2-Pad10): U2.10
unconnected-(U2-Pad11): U2.11
unconnected-(U2-Pad12): U2.12
unconnected-(U2-Pad13): U2.13
unconnected-(U2-Pad15): U2.15
unconnected-(U2-Pad19): U2.19
unconnected-(U2-Pad20): U2.20
unconnected-(U2-Pad22): U2.22
unconnected-(U3-Pad10): U3.10
unconnected-(U3-Pad11): U3.11
unconnected-(U3-Pad12): U3.12
unconnected-(U3-Pad13): U3.13
unconnected-(U3-Pad15): U3.15
unconnected-(U3-Pad19): U3.19
unconnected-(U3-Pad20): U3.20
unconnected-(U3-Pad22): U3.22
unconnected-(U4-Pad10): U4.10
unconnected-(U4-Pad11): U4.11
unconnected-(U4-Pad12): U4.12
unconnected-(U4-Pad13): U4.13
unconnected-(U4-Pad15): U4.15
unconnected-(U4-Pad19): U4.19
unconnected-(U4-Pad20): U4.20
unconnected-(U4-Pad22): U4.22

## Polygon pours and split planes (outlines as drawn)
GND on In1.Cu "In1.Cu-GND" (solid, remove dead copper, pour order 0): 200,23.783 109,23.783 109,119.783 200,119.783
+12V on In2.Cu "In2.Cu-+12V" (solid, remove dead copper, pour order 2): 195.199,23.908 115.443,23.4 115.443,110.776 129.159,110.805 129.286,32.163 176.276,32.163 176.38,110.873 194.945,110.903
+5V on In2.Cu "In2.Cu-+5V" (solid, remove dead copper, pour order 1): 173.99,34.703 131.291,34.957 131.826,116.364 173.863,116.237

## Keep-outs
Edge.Cuts:
  lines w0.1: 109.22,28.988 ccw(c114.3,28.988) 114.3,23.908 ; 109.22,28.988 ccw(c114.3,28.988) 114.3,23.908 ; 109.22,28.988 109.22,60.311 ; 109.22,28.988 109.22,60.311 ; 109.22,60.311 cw(c110.363,60.311) 110.363,61.454 ; 109.22,60.311 cw(c110.363,60.311) 110.363,61.454 ; 109.22,83.471 ccw(c110.363,83.471) 110.363,82.328 ; 109.22,83.471 ccw(c110.363,83.471) 110.363,82.328 ; 109.22,83.471 109.22,114.713 ; 109.22,83.471 109.22,114.713 ; 109.22,114.713 cw(c114.3,114.713) 114.3,119.793 ; 109.22,114.713 cw(c114.3,114.713) 114.3,119.793 ; 110.363,61.454 ccw(c110.363,62.597) 111.506,62.597 ; 110.363,61.454 ccw(c110.363,62.597) 111.506,62.597 ; 110.363,82.328 cw(c110.363,81.185) 111.506,81.185 ; 110.363,82.328 cw(c110.363,81.185) 111.506,81.185 ; 111.506,62.597 111.506,81.185 ; 111.506,62.597 111.506,81.185 ; 114.3,23.908 143.764,23.908 ; 114.3,23.908 143.764,23.908 ; 114.3,119.793 144.318,119.793 ; 114.3,119.793 144.318,119.793 ; 143.764,23.908 ccw(c143.764,25.051) 144.907,25.051 ; 143.764,23.908 ccw(c143.764,25.051) 144.907,25.051 ; 144.318,119.793 cw(c144.318,118.65) 145.461,118.65 ; 144.318,119.793 cw(c144.318,118.65) 145.461,118.65 ; 144.907,25.051 cw(c145.923,25.051) 145.923,26.067 ; 144.907,25.051 cw(c145.923,25.051) 145.923,26.067 ; 145.461,118.65 ccw(c146.604,118.65) 146.604,117.507 ; 145.461,118.65 ccw(c146.604,118.65) 146.604,117.507 ; 145.923,26.067 164.973,26.067 ; 145.923,26.067 164.973,26.067 ; 146.604,117.507 164.592,117.507 ; 146.604,117.507 164.592,117.507 ; 164.592,117.507 ccw(c164.592,118.65) 165.735,118.65 ; 164.592,117.507 ccw(c164.592,118.65) 165.735,118.65 ; 164.973,26.067 cw(c164.973,25.051) 165.989,25.051 ; 164.973,26.067 cw(c164.973,25.051) 165.989,25.051 ; 165.735,118.65 cw(c166.878,118.65) 166.878,119.793 ; 165.735,118.65 cw(c166.878,118.65) 166.878,119.793 ; 165.989,25.051 ccw(c167.132,25.051) 167.132,23.908 ; 165.989,25.051 ccw(c167.132,25.051) 167.132,23.908 ; 166.878,119.793 194.31,119.793 ; 166.878,119.793 194.31,119.793 ; 167.132,23.908 194.31,23.908 ; 167.132,23.908 194.31,23.908 ; 194.31,23.908 ccw(c194.31,28.988) 199.39,28.988 ; 194.31,23.908 ccw(c194.31,28.988) 199.39,28.988 ; 194.31,119.793 cw(c194.31,114.713) 199.39,114.713 ; 194.31,119.793 cw(c194.31,114.713) 199.39,114.713 ; 197.104,62.389 ccw(c198.247,62.389) 198.247,61.246 ; 197.104,62.389 ccw(c198.247,62.389) 198.247,61.246 ; 197.104,62.389 197.104,80.931 ; 197.104,62.389 197.104,80.931 ; 197.104,80.931 cw(c198.247,80.931) 198.247,82.074 ; 197.104,80.931 cw(c198.247,80.931) 198.247,82.074 ; 198.247,61.246 cw(c198.247,60.103) 199.39,60.103 ; 198.247,61.246 cw(c198.247,60.103) 199.39,60.103 ; 198.247,82.074 ccw(c198.247,83.217) 199.39,83.217 ; 198.247,82.074 ccw(c198.247,83.217) 199.39,83.217 ; 199.39,28.988 199.39,60.103 ; 199.39,28.988 199.39,60.103 ; 199.39,83.217 199.39,114.713 ; 199.39,83.217 199.39,114.713

## Silkscreen, mask and mechanical layers (free items; w line width, h text height)
F.SilkS:
  circle w0.15: c186.944,117.253 r0.568
  lines w0.15: 149.733,59.849 154.305,59.849 154.305,54.134 ; 149.828,100.489 153.638,100.489 153.638,94.774 ; 150.114,84.614 153.67,84.614 153.638,93.504 ; 150.368,42.45 153.543,42.45 153.543,52.102 ; 155.829,54.134 155.829,59.849 160.147,59.849 ; 156.337,100.489 160.02,100.489 160.02,94.774 ; 156.464,52.102 156.464,42.323 159.766,42.323 ; 156.464,93.377 156.464,84.614 160.401,84.614 ; 188.257,33.687 198.417,33.687
  text "Brachiosaurus" at 191.75,34.163 h1
  text "RWL-DB-REVA" at 120.992,24.712 h1.2
B.SilkS:
  text "Yasin Shahrami / Davis Edward / Cal Graham / Alex Bartley / Aidan Sheedy" at 138.836,44.769 h1.5
  text "SN: ___________" at 185.519,25.315 h1.5

## Dimensions
109.22,119.793 to 109.22,72.041 on F.Fab
199.39,23.908 to 194.31,23.908 on F.Fab
199.517,41.942 to 199.517,23.908 on F.Fab
199.39,23.908 to 199.39,28.988 on F.Fab
109.22,119.793 to 109.22,114.713 on F.Fab
109.22,119.793 to 199.39,119.793 on F.Fab
109.22,119.793 to 118.11,119.793 on F.Fab
109.22,23.908 to 114.3,23.908 on F.Fab
109.22,119.793 to 109.22,23.908 on F.Fab
109.22,119.793 to 191.77,119.793 on F.Fab
202.184,119.793 to 202.184,72.041 on F.Fab
109.22,23.908 to 109.22,28.988 on F.Fab
104.267,41.942 to 104.267,23.908 on F.Fab
104.902,119.793 to 104.902,101.759 on F.Fab
199.898,119.793 to 199.898,101.759 on F.Fab

## Text inside footprints (layer, text, board x,y; h text height)
J1: F.SilkS "H1" at 188.734,110.88 h1; F.SilkS "H2" at 188.698,106.051 h1
J2: F.Fab "*" at 116.703,76.491 h1 r90; F.Fab "*" at 116.703,76.491 h1 r90; Cmts.User "Copyright 2021 Accelerated Designs. All rights reserved." at 116.635,75.752 h0.13 r90
J3: F.Fab "*" at 192.139,86.571 h1 r90; F.Fab "*" at 192.139,86.571 h1 r90; Cmts.User "Copyright 2021 Accelerated Designs. All rights reserved." at 192.071,85.832 h0.13 r90
J4: F.Fab "*" at 116.705,57.267 h1 r90; F.Fab "*" at 116.705,57.267 h1 r90; Cmts.User "Copyright 2021 Accelerated Designs. All rights reserved." at 116.636,56.528 h0.13 r90
J5: F.Fab "*" at 192.139,67.347 h1 r90; F.Fab "*" at 192.139,67.347 h1 r90; Cmts.User "Copyright 2021 Accelerated Designs. All rights reserved." at 192.071,66.608 h0.13 r90